# EAGLE board Audio input (EAGLE 6.2)
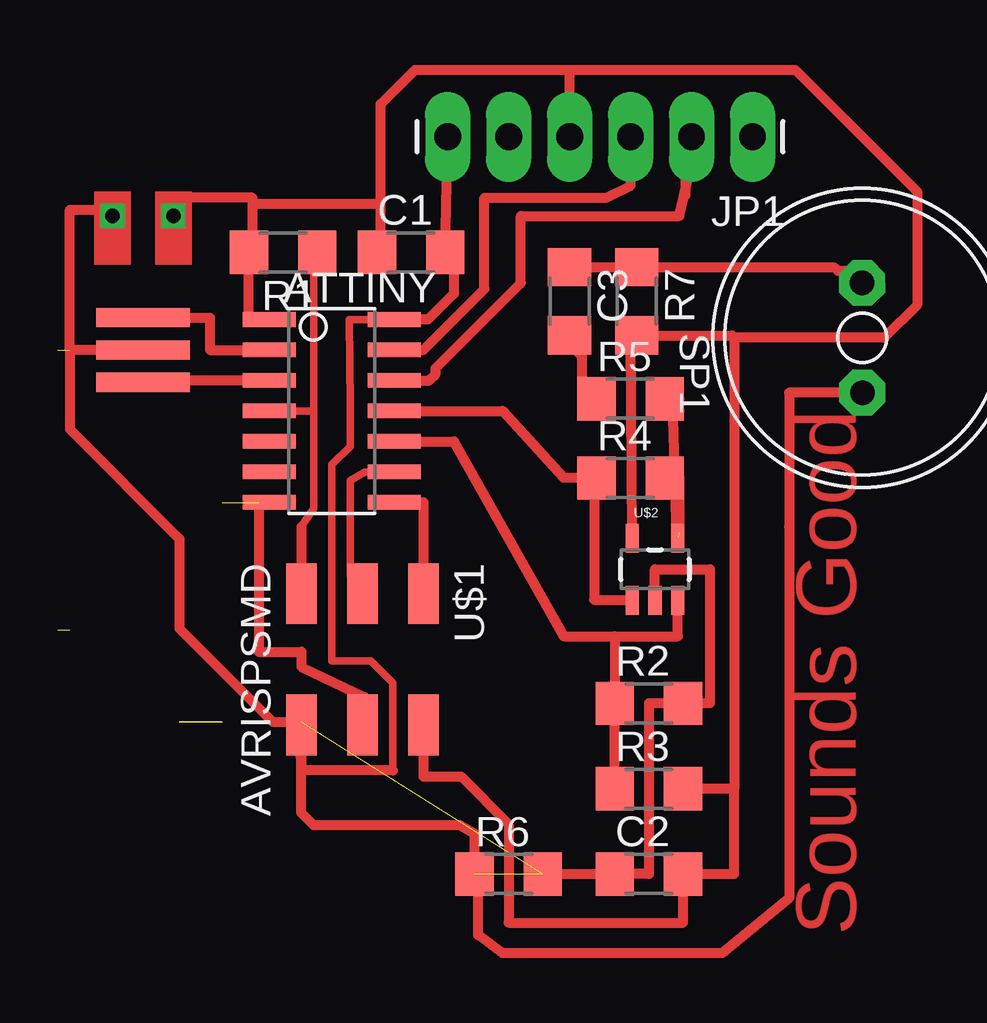
[diagram p0: board, top side]

No outline drawn. Coordinates in mm, seen from the top.
Copper layers (1*16): Top 0.035mm / dielectric 1.5mm / Bottom 0.035mm
Design rules: minimum track width 10mil, minimum drill 24mil, track to track 8mil, track to pad 8mil, pad to pad 8mil, via to via 8mil, smd to smd 8mil, copper to edge 40mil, drill to drill 8mil, minimum pad ring 10mil, minimum via ring 8mil, stop-mask expansion 4mil, vias tented up to drill 0mil, thermal gap 10mil

## Footprints (pad centres in the part's own frame; a part is rotated, then mirrored left to right if it is on the bottom)
SOIC14 = smd 0.61 x 2.21: 1 -3.81,-2.603; 2 -2.54,-2.603; 3 -1.27,-2.603; 4 0,-2.603; 5 1.27,-2.603; 6 2.54,-2.603; 7 3.81,-2.603; 8 3.81,2.603; 9 2.54,2.603; 10 1.27,2.603; 11 0,2.603; 12 -1.27,2.603; 13 -2.54,2.603; 14 -3.81,2.603
1206 = smd 1.6 x 1.803: 1 -1.422,0; 2 1.422,0
1X06_LONGPADS = drill 1.118 pad 1.88 long: 1 0,0; 2 2.54,0; 3 5.08,0; 4 7.62,0; 5 10.16,0; 6 12.7,0
EFOBM = smd 0.8 x 3.9: 1 -1.35,0; 2 0,0; 3 1.35,0
AL11P = drill 1.016 pad 1.905 octagon: + 2.286,0; - -2.286,0
2X03SMD = smd 2.54 x 1.27: 1 -2.54,2.54; 2 2.92,2.54; 3 -2.54,0; 4 2.92,0; 5 -2.54,-2.54; 6 2.92,-2.54
SOT23-5 = smd 0.55 x 1.2: 1 -0.95,-1.3; 2 0,-1.3; 3 0.95,-1.3; 4 0.95,1.3; 5 -0.95,1.3

## Placement (x,y rotation side)
ATTINY  ATTINY44-SSU  [SOIC14]  40.64,27.94 270 top
C1  [1206]  43.94,34.54 0 top
C2  [1206]  53.85,8.64 0 top
C3  [1206]  50.55,32.51 270 top
JP1  [1X06_LONGPADS]  58.17,39.37 180 top
QUARTZ  RESONATOR  [EFOBM]  32.77,30.48 90 top
R1  [1206]  38.61,34.54 180 top
R2  [1206]  53.85,15.75 0 top
R3  [1206]  53.85,12.19 0 top
R4  [1206]  53.09,25.15 0 top
R5  [1206]  53.09,28.45 0 top
R6  [1206]  48.01,8.64 0 top
R7  [1206]  53.34,32.51 270 top
SP1  AL11P  [AL11P]  62.74,30.99 90.1 top
U$1  AVRISPSMD  [2X03SMD]  41.91,17.78 270 top
U$2  OPA344  [SOT23-5]  54.1,21.34 0 top

## Library data of the parts
ATTINY QUARTZ U$1 = fab
C1-C3 = FAB_Hello
JP1 = SparkFun-Connectors
R1-R7 = ng
SP1 = buzzer; OC_FARNELL: unknown; OC_NEWARK: unknown
U$2 = SparkFun-AnalogIC

## Nets
BUT: ATTINY.5
GND: ATTINY.14 C1.2 C2.1 JP1.6 QUARTZ.2 R2.2 R6.1 R6.2 SP1.- U$1.6 U$2.2
LED: ATTINY.6
MIC+: C3.1 R7.1 SP1.+
MICCAP: C3.2 R5.1
MISO: ATTINY.8 U$1.1
MOSI: ATTINY.7 U$1.4
OPAI+: ATTINY.10 R2.1 R3.1 U$2.3
OPAI-: R4.2 R5.2 U$2.4
OPAOV: ATTINY.11 R4.1 U$2.1
RST: ATTINY.4 R1.1 U$1.5
RX: ATTINY.12 JP1.2
SCK: ATTINY.9 U$1.3
TX: ATTINY.13 JP1.3
VCC: ATTINY.1 C1.1 C2.2 JP1.4 R1.2 R3.2 R7.2 U$1.2 U$2.5
XTAL1: ATTINY.2 QUARTZ.3
XTAL2: ATTINY.3 QUARTZ.1

## Tracks (layer width: path | path; a pad name or v marks a point on that pad's centre or on a via)
GND  (6 unrouted)
  Top 0.305: ATTINY.14 41.36,31.75 41.4,28.19 41.4,26.46 40.64,25.7 40.64,17.53 42.26,17.53 43.18,16.61 43.18,12.95
  Top 0.406: JP1.6 C1.2 45.72,34.54 45.72,32.83 44.64,31.75 ATTINY.14 | U$1.6 39.37,12.95 | 39.37,12.95 39.31,14.99 | 39.31,14.99 38.17,14.99 34.29,18.86 34.29,22.61 29.72,27.18 29.72,30.48 | 43.18,12.95 39.37,12.95 | U$2.2 54.1,21.34 56.39,21.34 56.39,15.75 R2.2 53.85,15.75 53.85,8.64 C2.1 R6.2 | QUARTZ.2 29.72,30.48 | 39.37,12.95 39.37,11.18 39.88,10.67 45.97,10.67 46.58,10.31 R6.1 46.74,8.53 46.74,6.1 47.75,5.33 56.9,5.33 59.69,7.62 59.69,23.11 59.69,28.7 SP1.- | 39.31,14.99 39.37,14.99 | 29.72,30.48 29.72,36.32 31.75,36.32
MIC+
  Top 0.406: C3.1 R7.1 61.57,33.93 61.72,33.78 62.23,33.78 SP1.+ 62.48,33.53
MICCAP
  Top 0.406: C3.2 50.55,30.73 51.05,30.23 51.05,29.21 51.31,28.96 51.31,28.8 R5.1
MISO
  Top 0.406: ATTINY.8 44.45,24.13 U$1.1
MOSI  (1 unrouted)
  Top 0.406: ATTINY.7 37.59,24.13 37.59,17.9 39.37,17.9 39.37,17.27 42.03,16 41.95,14.73 41.91,14.01 U$1.4
N$1  (via drill 0.6)
  other vias: 34.04,36.07
N$2  (via drill 0.6)
  other vias: 31.5,36.07
N$3
  Top 0.406: 37.34,36.83 34.04,36.83
OPAI+
  Top 0.406: ATTINY.10 45.72,26.67 50.29,18.54 52.43,18.54 | 52.43,18.54 R2.1 R3.1 | 52.43,18.54 55.05,18.54 U$2.3
OPAI-  (1 unrouted)
  Top 0.406: R4.2 55.12,25.15 55.12,22.86 | U$2.4 55.02,22.64 54.86,27.69 54.86,27.94 55.12,27.94 55.12,28.45 R5.2
OPAOV
  Top 0.406: U$2.1 53.15,20.07 51.56,20.07 51.56,25.15 R4.1 50.29,25.15 47.75,27.94 ATTINY.11
RST
  Top 0.305: 39.88,34.54 39.88,27.94 | 39.88,27.94 39.88,23.88 39.37,23.11 | ATTINY.4 39.88,27.94
  Top 0.406: R1.1 39.88,34.54 | 39.37,23.11 U$1.5
RX
  Top 0.406: ATTINY.12 44.7,29.21 44.96,29.46 44.96,29.72 48.51,33.27 48.51,36.07 55.12,36.07 55.29,36.85 | 55.29,36.85 55.63,38.35 | JP1.2 55.63,39.12 55.37,38.86 55.37,36.93 55.29,36.85
SCK
  Top 0.305: ATTINY.9 42.02,25.4 41.4,25.04 41.4,21.08 U$1.3
TX
  Top 0.406: ATTINY.13 44.45,30.48 46.99,33.02 46.99,36.83 52.07,36.83 53.09,37.34 JP1.3
VCC
  Top 0.406: ATTINY.1 37.19,31.75 R1.2 37.34,34.54 37.34,36.58 42.67,36.58 | U$2.5 53.09,31.02 R7.2 57.3,31.09 57.4,30.99 | U$1.2 44.45,12.7 46.02,12.7 48.01,10.72 48.01,6.6 55.27,6.6 C2.2 57.4,8.64 57.4,12.19 | 57.4,30.99 57.4,12.19 | 57.4,12.19 R3.2 | C1.1 42.67,34.54 42.67,36.58 | 42.67,36.58 42.67,40.73 44.11,42.16 50.55,42.16 | JP1.4 50.55,42.16 | 50.55,42.16 59.94,42.16 65.02,37.08 65.02,32.36 63.66,30.99 57.4,30.99
XTAL1
  Top 0.406: QUARTZ.3 35.56,31.83 35.56,30.48 ATTINY.2
XTAL2
  Top 0.406: ATTINY.3 32.77,29.21 QUARTZ.1
(copper drawn outside any net)
  shapes: Top area x2

## Text on the board
Top: Sounds Good